# Altium PCB extensionV1.0.PcbDoc (part 2 of 2)
Units mm, origin at the board's own origin, x right, y up, seen from the top; angles counter-clockwise.
Board outline 110.36 x 57.4 mm, 2 copper layers (Top Layer, Bottom Layer); 166 components, 161 nets, 516 pads, 220 vias.
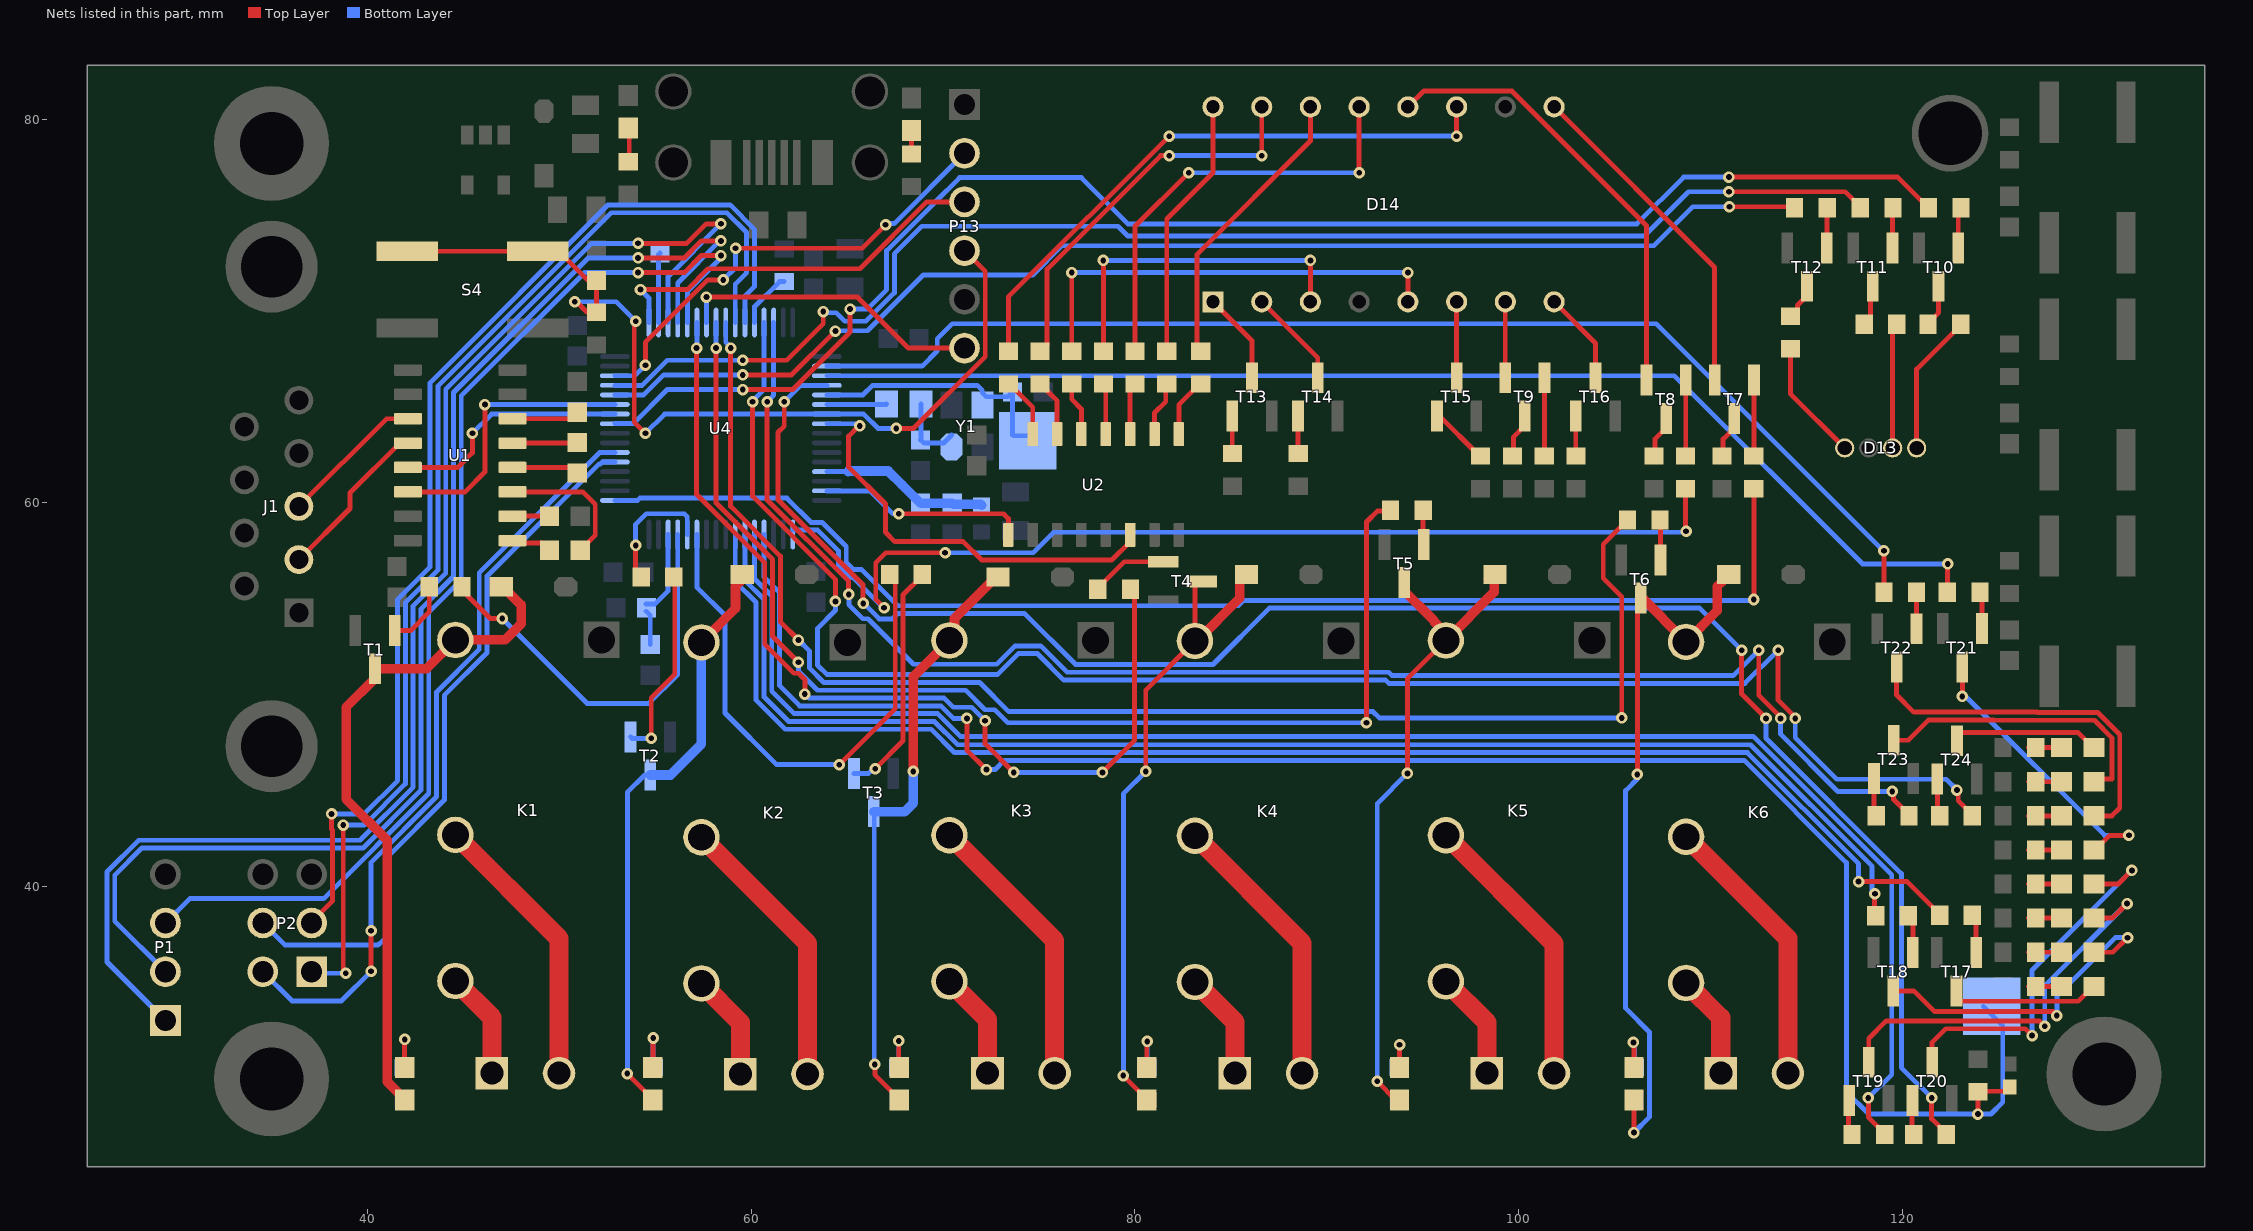
[diagram p2: the nets of this part, all layers, seen from the top]

## Via types
v1: diameter 0.6, hole 0.3, Top Layer to Bottom Layer, tented both sides, 220 vias

## Nets (pads, with @x,y where several pads share a name; then routed paths per layer and width w, separated by ;. In a path a pad name is that pad's centre, name@x,y a point inside that pad or via, vN(x,y) a via of type N, cw(c..) or ccw(c..) an arc to the next point about the centre after c; other vN are vias at no path point) (continued)
L1_L2: R19.2 U4.17 | length 54.6
  Top Layer w0.254: v1(66.929,54.534) 66.493,54.97 66.493,56.877 67.02,57.404 v1(70.104,57.404) ; v1@108.712,58.522 R19.2@108.712,60.745
  Bottom Layer w0.254: U4.17@62.17,58.581 62.172,58.583 63.464,58.583 64.546,57.501 64.546,56.742 65.168,56.12 65.299,56.12 66.885,54.534 v1(66.929,54.534) ; v1(70.104,57.404) 74.701,57.404 75.768,58.471 108.687,58.471 v1(108.737,58.522)
L3: R18.2 U4.33 | length 68.4
  Top Layer w0.254: v1(112.268,54.966) R18.2@112.268,60.745 R18.2@112.478,60.535
  Bottom Layer w0.254: U4.33@52.895,60.131 54.074,60.131 54.191,60.249 61.858,60.249 63.118,58.989 63.693,58.989 64.953,57.729 64.953,56.91 65.336,56.526 65.756,56.526 67.642,54.64 85.4,54.64 85.679,54.92 112.222,54.92 v1(112.268,54.966)
LD_1: U2.1 U4.15 | length 10.9
  Top Layer w0.254: v1(67.691,59.436) 73.152,59.436 73.406,59.182 U2.1@73.406,58.335
  Bottom Layer w0.254: U4.15@63.945,60.631 66.185,60.631 67.38,59.436 v1(67.691,59.436)
LED_1: R39.2 U4.23 | length 76
  Top Layer w0.254: v1(117.729,40.259) 120.256,40.259 121.959,38.556 R39.2@121.959,38.506
  Bottom Layer w0.254: U4.23@59.17,58.356 59.17,55.898 60.259,54.809 60.259,49.723 61.781,48.201 69.382,48.201 70.593,46.99 106.184,46.99 106.189,46.985 111.933,46.985 117.729,41.189 v1(117.729,40.259)
LED_2: R41.2 U4.22 | length 72.6
  Top Layer w0.254: R41.2@118.562,38.804 118.562,39.605 v1(118.581,39.624)
  Bottom Layer w0.254: U4.22@59.67,58.356 59.67,55.973 60.665,54.978 60.665,49.891 61.949,48.608 69.55,48.608 70.762,47.396 112.097,47.396 118.435,41.058 118.435,39.68 v1@118.491,39.624
LED_3: R43.2 U4.21 | length 85.3
  Top Layer w0.254: v1(118.237,28.981) 118.237,27.976 119.087,27.126 R43.2@119.087,27.076
  Bottom Layer w0.254: U4.21@60.17,58.356 60.17,56.048 61.072,55.146 61.072,50.18 62.238,49.014 69.718,49.014 70.904,47.828 112.24,47.828 119.456,40.612 119.456,30.201 v1(118.237,28.981)
LED_4: R45.2 U4.4 | length 94.2
  Top Layer w0.254: v1(61.722,65.278) 61.722,64.008 61.397,63.683 61.397,60.164 65.837,55.724 v1(65.837,54.762) ; v1(111.633,52.324) 111.633,50.038 v1(112.903,48.768) ; v1(121.539,28.981) 121.539,27.888 122.301,27.126 R45.2@122.301,27.076
  Bottom Layer w0.254: v1(61.722,65.278) 62.575,66.131 U4.4@63.945,66.131 ; v1(65.837,54.762) 65.862,54.762 66.67,53.954 67.366,53.954 67.64,54.229 74.26,54.229 76.912,51.577 84.074,51.577 87.01,54.513 109.444,54.513 v1(111.633,52.324) ; v1(112.903,48.768) 112.903,47.74 119.964,40.678 119.964,30.556 v1(121.539,28.981)
LED_5: R47.2 U4.3 | length 64
  Top Layer w0.254: R47.2@122.356,55.344 122.356,56.799 v1(122.377,56.82)
  Bottom Layer w0.254: U4.3@63.945,66.631 108.121,66.631 117.932,56.82 v1(122.377,56.82)
LED_6: R49.2 U4.2 | length 63.5
  Top Layer w0.254: v1(119.05,57.506) 119.05,55.417 119.015,55.383 R49.2@119.054,55.344
  Bottom Layer w0.254: U4.2@63.945,67.131 68.909,67.131 69.697,67.919 69.697,68.554 70.485,69.342 107.188,69.342 119.024,57.506 v1(119.05,57.506)
LED_7: R51.2 U4.62 | length 80.5
  Top Layer w0.254: v1(60.833,65.278) 60.833,60.153 65.077,55.909 65.077,55.24 v1(65.089,55.228) ; v1(112.522,52.324) 112.522,49.968 113.665,48.825 v1(113.665,48.768) ; v1(119.482,44.958) 119.548,44.892 119.548,44.547 120.357,43.738 R51.2@120.357,43.688
  Bottom Layer w0.254: v1(60.833,65.278) 61.17,65.615 U4.62@61.17,69.406 ; v1(65.089,55.228) 65.089,54.691 65.82,53.96 66.09,53.96 68.462,51.587 72.799,51.587 73.76,52.548 75.094,52.548 76.471,51.171 93.238,51.171 93.411,50.998 111.196,50.998 v1(112.522,52.324) ; v1(113.665,48.768) 113.665,47.946 116.653,44.958 v1(119.482,44.958)
LED_8: R53.2 U4.61 | length 88.6
  Top Layer w0.254: v1(60.071,65.278) 60.071,60.34 64.389,56.022 v1(64.389,54.864) ; v1(113.538,52.324) 113.538,49.714 114.427,48.825 v1(114.427,48.768) ; v1(122.86,45.034) 122.926,44.968 122.926,44.471 123.659,43.738 R53.2@123.659,43.688
  Bottom Layer w0.254: v1(60.071,65.278) 60.071,65.335 60.67,65.934 U4.61@60.67,69.406 ; v1(64.389,54.864) 64.389,54.391 63.45,53.451 63.45,51.552 63.956,51.046 72.833,51.046 73.928,52.141 74.925,52.141 76.302,50.764 93.07,50.764 93.242,50.592 111.806,50.592 v1(113.538,52.324) ; v1(114.427,48.768) 114.427,47.758 116.592,45.593 122.301,45.593 v1(122.86,45.034)
MISO: P1.2 U4.52 | length 67.8
  Top Layer w0.254: v1(54.102,72.771) 56.515,72.771 57.404,73.66 v1(58.42,73.66)
  Bottom Layer w0.254: P1.2@29.464,35.56 26.822,38.202 26.822,40.599 28.235,42.012 39.775,42.012 42.783,45.019 42.783,54.465 44.48,56.162 44.48,65.756 51.495,72.771 v1(54.102,72.771) ; U4.52@56.17,69.406 56.17,71.467 58.363,73.66 v1(58.42,73.66)
MOSI: P1.3 U4.53 | length 58.7
  Top Layer w0.254: v1(54.102,72.009) 56.515,72.009 57.404,72.898 v1(58.42,72.898)
  Bottom Layer w0.254: P1.3@29.464,38.1 30.734,39.37 37.709,39.37 43.189,44.851 43.189,54.297 44.887,55.994 44.887,65.588 51.308,72.009 v1(54.102,72.009) ; U4.53@56.67,69.406 56.67,71.021 58.42,72.771 v1(58.42,72.898)
NetC1_1: C1.1 U1.1 | length 2.1
  Top Layer w0.254: U1.1@47.556,58.039 47.691,57.904 49.119,57.904 C1.1@49.492,57.531
NetC1_2: C1.2 U1.3 | length 7.3
  Top Layer w0.254: U1.3@47.556,60.579 51.217,60.579 51.871,59.925 51.871,58.31 C1.2@51.092,57.531
NetC2_1: C2.1 U1.5 | length 3.4
  Top Layer w0.254: U1.5@47.556,63.119 50.889,63.119 C2.1@50.927,63.157
NetC2_2: C2.2 U1.4 | length 3.4
  Top Layer w0.254: U1.4@47.556,61.849 50.762,61.849 C2.2@50.927,61.684
NetC3_2: C3.2 U1.2 | length 1.9
  Top Layer w0.254: U1.2@47.556,59.309 C3.2@49.492,59.309
NetC4_2: C4.2 U1.6 | length 3.5
  Top Layer w0.254: U1.6@47.556,64.389 50.584,64.389 C4.2@50.927,64.732
NetC13_2: C13.2 R58.2 Y1.1 | length 3.7
  Bottom Layer w0.254: C13.2@68.834,63.284 C13.2@68.845,63.295 ; R58.2@68.845,65.151 C13.2@68.845,63.295 ; Y1.1@70.447,63.543 70.023,63.119 69.021,63.119 C13.2@68.845,63.295
NetC14_2: C14.2 P12.1 U4.5 Y1.3 | length 13.4
  Bottom Layer w0.254: U4.5@63.945,65.631 65.83,65.631 66.329,66.13 71.785,66.13 72.047,65.868 72.047,65.743 72.258,65.532 73.368,65.532 C14.2@73.622,65.786 73.622,63.538 73.66,63.5 P12.1@74.422,63.5
NetC15_2: C15.2 C16.2 U4.30 | length 6.2
  Bottom Layer w0.254: C15.2@54.521,54.356 54.737,54.14 C16.2@54.737,52.616 ; C15.2@54.521,54.737 54.991,54.737 55.67,55.416 U4.30@55.67,58.356
NetC24_2: C24.2 P13.4 R60.2 S4.1 S4.4 U4.7 | length 49.4
  Top Layer w0.254: S4.1@42.066,73.12 S4.4@48.866,73.12 49.966,73.12 51.712,71.374 51.727,71.374 C24.2@51.943,71.59 R60.2@51.943,69.938 51.441,69.938 50.894,70.485 v1(50.8,70.485) ; v1(53.975,69.469) 53.904,69.398 53.904,64.206 v1(54.483,63.627) ; v1(67.564,63.881) 68.456,63.881 72.199,67.625 72.199,72.073 P13.4@71.12,73.152
  Bottom Layer w0.254: v1(50.8,70.485) 52.959,70.485 v1(53.975,69.469) ; v1(54.483,63.627) 55.487,64.631 U4.7@63.945,64.631 65.87,64.631 66.62,63.881 v1(67.564,63.881)
NetC26_2: C26.2 C27.2 L1.1 U4.13 | length 8.8
  Bottom Layer w0.254: U4.13@63.945,61.631 63.947,61.633 65.062,61.633
  Bottom Layer w0.5: 65.062,61.633 65.091,61.662 67.138,61.662 67.853,60.947 67.869,60.947 C26.2@68.834,59.982 C27.2@70.485,59.982 70.535,59.932 71.959,59.932 L1.1@72.009,59.882
NetD1_1: D1.1 D2.1 K1.4 T1.3 | length 35.4
  Top Layer w0.5: D2.1@41.935,28.868 41.935,28.918 41.033,29.82 41.033,42.403 38.887,44.549 38.887,49.356 40.386,50.854 T1.3@40.386,51.354 43.074,51.354 K1.4@44.577,52.857 47.168,52.857 48.008,53.697 48.008,54.688 47.07,55.626 D1.1@46.96,55.626
NetD2_2: D2.2 R1.1 | length 2.9
  Top Layer w0.254: D2.2@41.935,30.568 v1(41.935,32.029)
  Bottom Layer w0.254: R1.1@41.91,30.568 41.935,30.593 v1(41.935,32.029)
NetD3_1: D3.1 D4.1 K2.4 T2.3 | length 31.4
  Top Layer w0.254: v1(53.543,30.251) 53.543,30.239 54.864,28.918 D4.1@54.864,28.868
  Top Layer w0.5: K2.4@57.404,52.73 59.182,54.508 59.182,55.656 59.427,55.901 59.427,56.011 59.677,56.261 D3.1@59.787,56.261
  Bottom Layer w0.254: v1(53.543,30.251) 53.543,44.907 54.453,45.817 T2.3@54.737,45.817
  Bottom Layer w0.5: T2.3@54.737,45.817 55.792,45.817 57.404,47.429 K2.4@57.404,52.73
NetD4_2: D4.2 R4.1 | length 3.1
  Top Layer w0.254: D4.2@54.864,30.568 54.889,30.593 v1(54.889,32.106)
  Bottom Layer w0.254: R4.1@54.889,30.568 v1(54.889,32.106)
NetD5_1: D5.1 D6.1 K3.4 T3.3 | length 31.6
  Top Layer w0.254: v1(66.446,30.73) 66.446,30.188 67.716,28.918 D6.1@67.716,28.868
  Top Layer w0.5: v1(68.453,45.999) 68.453,50.952 K3.4@70.333,52.832 70.6,53.1 70.6,53.977 72.758,56.134 D5.1@72.868,56.134
  Bottom Layer w0.254: T3.3@66.387,43.908 66.417,43.878 66.417,30.76 v1(66.446,30.73) v1@66.446,30.675
  Bottom Layer w0.5: T3.3@66.387,43.908 68.012,43.908 68.453,44.348 v1(68.453,45.999)
NetD6_2: D6.2 R7.1 | length 3.1
  Top Layer w0.254: v1(67.691,31.953) 67.691,30.39 D6.2@67.716,30.365
  Bottom Layer w0.254: R7.1@67.691,30.441 v1(67.691,31.953)
NetD7_1: D7.1 D8.1 K4.4 T4.3 | length 34
  Top Layer w0.254: v1(79.4,30.15) 79.4,30.137 80.62,28.918 D8.1@80.62,28.868 ; v1(80.569,45.999) 80.569,50.241 K4.4@83.134,52.807 83.134,55.727 83.312,55.905 T4.3@83.469,55.905
  Top Layer w0.5: K4.4@83.134,52.807 83.239,52.807 85.462,55.03 85.462,56.011 85.712,56.261 D7.1@85.822,56.261
  Bottom Layer w0.254: v1(79.4,30.15) 79.4,44.831 v1(80.569,45.999)
NetD8_2: D8.2 R10.1 | length 2.7
  Top Layer w0.254: D8.2@80.62,30.568 80.62,31.902 v1(80.645,31.928)
  Bottom Layer w0.254: R10.1@80.62,30.568 80.645,30.593 v1(80.645,31.928)
NetD9_1: D9.1 D10.1 K5.4 T5.3 | length 34.9
  Top Layer w0.254: v1(92.634,29.845) 93.611,28.868 D10.1@93.802,28.868 ; v1(94.209,45.898) 94.209,50.825 K5.4@96.215,52.832
  Top Layer w0.5: T5.3@94.04,55.846 94.04,55.42 95.573,53.887 95.573,53.853 96.215,53.211 K5.4@96.215,52.832 98.73,55.347 98.73,56.215 D9.1@98.776,56.261 98.666,56.261 D9.1@98.416,56.011
  Bottom Layer w0.254: v1(92.634,29.845) 92.634,44.323 v1(94.209,45.898)
NetD10_2: D10.2 R12.1 | length 2.4
  Top Layer w0.254: D10.2@93.802,30.568 v1(93.802,31.75)
  Bottom Layer w0.254: R12.1@93.777,30.568 93.802,30.593 v1(93.802,31.75)
NetD11_1: D11.1 D12.1 K6.4 T6.3 | length 39
  Top Layer w0.254: v1(106.02,27.178) D12.1@106.02,28.868 ; v1(106.197,45.847) 106.197,54.86 T6.3@106.375,55.037
  Top Layer w0.5: T6.3@106.35,55.55 106.35,55.143 K6.4@108.737,52.756 110.363,54.381 110.363,55.656 110.608,55.901 110.608,56.011 110.858,56.261 D11.1@110.968,56.261
  Bottom Layer w0.254: v1(106.02,27.178) 106.824,27.983 106.824,32.418 105.588,33.655 105.588,44.999 106.197,45.609 v1(106.197,45.847)
NetD12_2: D12.2 R14.1 | length 2.6
  Top Layer w0.254: v1(105.994,31.877) 106.02,31.852 D12.2@106.02,30.568
  Bottom Layer w0.254: v1(105.994,31.877) 106.045,31.826 R14.1@106.045,30.568
NetD13_2: D13.2 R30.2 | length 6.3
  Top Layer w0.254: R30.2@114.173,68.035 114.173,65.699 D13.2@117.007,62.865
NetD13_3: D13.3 R29.2 | length 6.5
  Top Layer w0.254: D13.3@119.507,62.865 119.507,69.102 R29.2@119.722,69.317
NetD13_4: D13.4 R31.2 | length 7.4
  Top Layer w0.254: D13.4@120.757,62.865 120.757,66.974 123.049,69.267 R31.2@123.049,69.317
NetD14_1: D14.1 T13.3 | length 4.8
  Top Layer w0.254: D14.1@84.074,70.485 86.106,68.453 T13.3@86.106,66.527
NetD14_2: D14.2 T14.3 | length 5.2
  Top Layer w0.254: D14.2@86.614,70.485 89.535,67.564 T14.3@89.535,66.527
NetD14_3: D14.3 R25.1 | length 17.7
  Top Layer w0.254: R25.1@78.359,67.906 v1(78.359,72.644) ; D14.3@89.154,70.485 v1(89.154,72.644)
  Bottom Layer w0.254: v1(78.359,72.644) v1(89.154,72.644)
NetD14_5: D14.5 R26.1 | length 23.2
  Top Layer w0.254: R26.1@76.708,67.906 v1(76.708,72.009) ; D14.5@94.234,70.485 v1(94.234,72.009)
  Bottom Layer w0.254: v1(76.708,72.009) v1(94.234,72.009)
NetD14_6: D14.6 T15.3 | length 4.1
  Top Layer w0.254: T15.3@96.774,66.527 D14.6@96.774,70.485
  Top Layer w0.5: D14.6@96.702,70.413 D14.6@96.774,70.485 ; T15.3@96.774,66.527 T15.3@96.829,66.582
NetD14_7: D14.7 T9.2 | length 4
  Top Layer w0.254: T9.2@99.305,66.527 99.309,66.531 D14.7@99.309,70.48
  Top Layer w0.5: D14.7@99.309,70.48 D14.7@99.314,70.485
NetD14_8: D14.8 T16.3 | length 4.9
  Top Layer w0.254: D14.8@101.854,70.485 104.013,68.326 T16.3@104.013,66.527
NetD14_9: D14.9 T7.2 | length 17.7
  Top Layer w0.254: D14.9@101.854,80.645 110.227,72.272 T7.2@110.227,66.4
NetD14_11: D14.11 R27.1 | length 31.2
  Top Layer w0.254: R27.1@73.406,67.906 73.406,70.739 v1(81.788,79.121) ; v1(96.774,79.121) D14.11@96.774,80.645
  Bottom Layer w0.254: v1(81.788,79.121) v1(96.774,79.121)
NetD14_12: D14.12 T8.2 | length 23.7
  Top Layer w0.254: D14.12@94.234,80.645 95.063,81.474 99.658,81.474 106.671,74.461 T8.2@106.671,66.4
NetD14_13: D14.13 R24.1 | length 22.8
  Top Layer w0.254: R24.1@80.01,67.906 80.01,74.422 v1(82.804,77.216) ; v1(91.694,77.216) D14.13@91.694,80.645
  Bottom Layer w0.254: v1(82.804,77.216) v1(91.694,77.216)
NetD14_14: D14.14 R22.1 | length 15.3
  Top Layer w0.254: R22.1@83.439,67.906 83.245,68.1 83.245,72.958 89.154,78.867 D14.14@89.154,80.645
NetD14_15: D14.15 R28.1 | length 20.6
  Top Layer w0.254: R28.1@75.057,67.906 75.107,67.906 75.43,68.229 75.43,72.188 81.347,78.105 v1(81.788,78.105) ; v1(86.614,78.105) D14.15@86.614,80.645
  Bottom Layer w0.254: v1(81.788,78.105) v1(86.614,78.105)
NetD14_16: D14.16 R23.1 | length 13.7
  Top Layer w0.254: R23.1@81.661,67.906 81.661,74.803 84.074,77.216 D14.16@84.074,80.645
NetD15_1: D15.1 T17.3 | length 7.5
  Top Layer w0.254: T17.3@122.809,34.019 129.18,34.019 129.959,34.798 D15.1@130.009,34.798
NetD15_2: D15.2 R40.1 | length 1.7
  Top Layer w0.254: R40.1@126.58,34.798 D15.2@128.309,34.798
NetD16_1: D16.1 T18.3 | length 17.1
  Top Layer w0.254: T18.3@119.532,34.565 120.607,34.565 121.691,33.481 127.86,33.481 v1(128.067,33.274) ; D16.1@130.009,36.576 130.988,36.576 v1(131.75,37.338)
  Bottom Layer w0.254: v1(128.067,33.274) 128.067,34.29 131.115,37.338 v1(131.75,37.338)
NetD16_2: D16.2 R42.1 | length 1.7
  Top Layer w0.254: R42.1@126.58,36.576 D16.2@128.309,36.576
NetD17_1: D17.1 T19.3 | length 21.1
  Top Layer w0.254: T19.3@118.262,30.84 118.262,32.08 119.177,32.995 127.152,32.995 v1(127.432,32.715) ; D17.1@130.009,38.354 130.962,38.354 v1(131.724,39.116)
  Bottom Layer w0.254: v1(127.432,32.715) 127.432,34.823 v1(131.724,39.116)
NetD17_2: D17.2 R44.1 | length 1.7
  Top Layer w0.254: R44.1@126.58,38.354 D17.2@128.309,38.354
NetD18_1: D18.1 T20.3 | length 19.7
  Top Layer w0.254: T20.3@121.564,30.84 121.564,31.877 122.276,32.588 126.416,32.588 v1(126.771,32.233) ; D18.1@130.009,40.132 131.267,40.132 v1(131.978,40.843)
  Bottom Layer w0.254: v1(126.771,32.233) 126.771,35.636 v1(131.978,40.843)
NetD18_2: D18.2 R46.1 | length 1.7
  Top Layer w0.254: R46.1@126.58,40.132 D18.2@128.309,40.132
NetD19_1: D19.1 T21.3 | length 15.2
  Top Layer w0.254: v1(123.139,49.911) T21.3@123.139,51.456 ; D19.1@130.009,41.91 130.059,41.91 130.821,42.672 v1(131.826,42.672)
  Bottom Layer w0.254: v1@123.317,49.911 130.556,42.672 v1(131.826,42.672)
NetD19_2: D19.2 R48.1 | length 1.7
  Top Layer w0.254: R48.1@126.58,41.91 D19.2@128.309,41.91
NetD20_1: D20.1 T22.3 | length 19.3
  Top Layer w0.254: T22.3@119.71,51.456 119.71,49.987 120.603,49.095 127.033,49.095 127.051,49.077 130.196,49.077 131.343,47.929 131.343,44.094 130.937,43.688 D20.1@130.009,43.688
NetD20_2: D20.2 R50.1 | length 1.7
  Top Layer w0.254: R50.1@126.58,43.688 D20.2@128.309,43.688
NetD21_1: D21.1 T23.3 | length 15.3
  Top Layer w0.254: T23.3@119.558,47.629 120.324,47.629 121.383,48.688 124.797,48.688 124.815,48.67 130.028,48.67 130.937,47.761 130.937,45.615 130.158,45.615 D21.1@130.009,45.466
NetD21_2: D21.2 R52.1 | length 1.7
  Top Layer w0.254: R52.1@126.58,45.466 D21.2@128.309,45.466
NetD22_1: D22.1 T24.3 | length 7.8
  Top Layer w0.254: T24.3@122.86,47.604 122.86,47.845 123.038,48.023 129.18,48.023 129.959,47.244 D22.1@130.009,47.244
NetD22_2: D22.2 R54.1 | length 1.7
  Top Layer w0.254: R54.1@126.58,47.244 D22.2@128.309,47.244
NetD23_2: D23.2 R55.1 | length 1.7
  Top Layer w0.254: R55.1@68.072,77.943 68.351,78.222 68.351,79.135 D23.2@68.072,79.414
NetD25_2: D25.2 R56.1 | length 1.6
  Top Layer w0.254: R56.1@53.645,78.003 D25.2@53.645,79.566
NetJ1_2: J1.2 U1.12 | length 8.7
  Top Layer w0.254: J1.2@36.42,57.047 39.083,59.71 39.083,60.521 41.681,63.119 U1.12@42.106,63.119
NetJ1_3: J1.3 U1.11 | length 7.6
  Top Layer w0.254: J1.3@36.42,59.817 40.992,64.389 U1.11@42.106,64.389
NetK1_2: K1.2 P3.1 | length 5.7
  Top Layer w1: K1.2@44.577,35.077 46.482,33.172 P3.1@46.482,30.272
  Bottom Layer w1: P3.1@46.419,30.035 P3.1@46.482,29.972
NetK1_3: K1.3 P3.2 | length 15
  Top Layer w1: K1.3@44.577,42.697 49.982,37.292 P3.2@49.982,30.272
  Bottom Layer w1: P3.2@49.982,29.972 P3.2@49.982,30.272
NetK2_2: K2.2 P4.1 | length 5.6
  Top Layer w1: K2.2@57.404,34.95 59.436,32.918 P4.1@59.436,30.226
NetK2_3: K2.3 P4.2 | length 15
  Top Layer w1: K2.3@57.404,42.57 62.936,37.038 P4.2@62.936,30.226
  Bottom Layer w1: P4.2@62.611,30.226 P4.2@62.865,29.972
NetK3_2: K3.2 P5.1 | length 5.9
  Top Layer w1: K3.2@70.333,35.052 72.319,33.066 P5.1@72.319,30.272
  Bottom Layer w1: P5.1@72.136,30.155 P5.1@72.319,29.972
NetK3_3: K3.3 P5.2 | length 15
  Top Layer w1: K3.3@70.333,42.672 75.819,37.186 P5.2@75.819,30.272
  Bottom Layer w1: P5.2@75.819,29.972 P5.2@75.819,30.272
NetK4_2: K4.2 P6.1 | length 5.7
  Top Layer w1: K4.2@83.134,35.027 85.217,32.944 P6.1@85.217,30.272
  Bottom Layer w1: P6.1@85.153,30.035 P6.1@85.217,29.972
NetK4_3: K4.3 P6.2 | length 15.1
  Top Layer w1: K4.3@83.134,42.647 88.717,37.064 P6.2@88.717,30.272
  Bottom Layer w1: K4.3@83.134,42.647 K4.3@83.205,42.647 ; P6.2@88.717,29.972 P6.2@88.717,30.272
NetK5_2: K5.2 P7.1 | length 5.8
  Top Layer w1: K5.2@96.215,35.052 98.354,32.913 P7.1@98.354,30.272
  Bottom Layer w1: P7.1@98.262,30.064 P7.1@98.354,29.972
NetK5_3: K5.3 P7.2 | length 15
  Top Layer w1: K5.3@96.215,42.672 101.854,37.033 P7.2@101.854,30.272
  Bottom Layer w1: P7.2@101.854,29.972 P7.2@101.854,30.272
NetK6_2: K6.2 P8.1 | length 5.7
  Top Layer w1: K6.2@108.737,34.976 110.546,33.167 P8.1@110.546,30.272 ; P8.1@110.454,30.064 P8.1@110.546,29.972
  Bottom Layer w1: K6.2@108.737,34.945 K6.2@108.737,34.976 ; P8.1@110.454,30.064 P8.1@110.546,29.972
NetK6_3: K6.3 P8.2 | length 14.8
  Top Layer w1: K6.3@108.737,42.596 114.046,37.287 P8.2@114.046,30.272
  Bottom Layer w1: P8.2@114.046,29.972 P8.2@114.046,30.272
NetP11_1: P11.1 U4.50 | length 3.7
  Bottom Layer w0.254: U4.50@55.17,69.406 55.17,72.95 P11.1@55.245,73.025
NetP13_2: P13.2 U4.46 | length 24.3
  Top Layer w0.254: v1(54.483,67.183) 54.483,68.372 57.739,71.628 v1(58.547,71.628) ; v1(59.182,73.279) 65.786,73.279 v1(67.005,74.498)
  Bottom Layer w0.254: U4.46@52.895,66.631 52.897,66.633 53.933,66.633 v1(54.483,67.183) ; v1(58.547,71.628) 59.182,72.263 v1(59.182,73.279) ; v1(67.005,74.498) 67.071,74.564 67.452,74.564 P13.2@71.12,78.232
NetP13_3: P13.3 U4.49 | length 20.7
  Top Layer w0.254: v1(54.229,71.12) 56.656,71.12 57.744,72.207 65.673,72.207 69.158,75.692 P13.3@71.12,75.692
  Bottom Layer w0.254: v1(54.229,71.12) 54.67,70.679 U4.49@54.67,69.406
NetP13_6: P13.6 U4.55 | length 15.9
  Top Layer w0.254: v1(57.664,70.733) 65.538,70.733 68.199,68.072 P13.6@71.12,68.072
  Bottom Layer w0.254: v1(57.664,70.733) 57.668,70.729 57.668,69.408 U4.55@57.67,69.406
NetR2_1: R2.1 T1.1 | length 3.5
  Top Layer w0.254: T1.1@41.411,53.344 42.245,53.344 43.219,54.319 R2.1@43.219,55.626 ; R2.1@43.18,55.626 R2.1@43.189,55.617
NetR5_1: R5.1 T2.1 | length 10
  Top Layer w0.254: v1(54.788,47.727) 54.788,49.845 56.016,51.073 56.016,56.086 R5.1@55.968,56.134
  Bottom Layer w0.254: T2.1@53.712,47.807 53.793,47.727 v1(54.788,47.727)
NetR8_1: R8.1 T3.1 | length 12.4
  Top Layer w0.254: v1(66.463,46.147) 67.915,47.599 67.915,55.204 68.922,56.211 R8.1@68.922,56.261 R8.1@68.979,56.204
  Bottom Layer w0.254: T3.1@65.362,45.898 66.12,45.898 66.369,46.147 v1(66.463,46.147)
NetR11_1: R11.1 T4.1 | length 4
  Top Layer w0.254: R11.1@78.068,55.499 78.068,55.549 79.449,56.93 T4.1@81.479,56.93
NetR13_1: R13.1 T5.1 | length 1.7
  Top Layer w0.254: T5.1@95.03,57.866 95.03,59.611 R13.1@95.033,59.614
NetR15_1: R15.1 T6.1 | length 1.8
  Top Layer w0.254: R15.1@107.34,58.826 107.4,58.767 T6.1@107.4,57.027
NetR16_1: R16.1 T7.3 | length 2.3
  Top Layer w0.254: R16.1@110.617,62.445 110.667,62.445 110.667,63.325 111.252,63.91 T7.3@111.252,64.41
NetR17_1: R17.1 T8.3 | length 2.3
  Top Layer w0.254: R17.1@107.061,62.445 107.111,62.445 107.111,63.325 107.696,63.91 T8.3@107.696,64.41
NetR18_1: R18.1 T7.1 | length 4
  Top Layer w0.254: R18.1@112.268,62.445 112.277,62.454 T7.1@112.277,66.4
NetR19_1: R19.1 T8.1 | length 4
  Top Layer w0.254: R19.1@108.712,62.445 108.721,62.454 T8.1@108.721,66.4
NetR20_2: R20.2 T9.3 | length 2.4
  Top Layer w0.254: R20.2@99.695,62.445 99.745,62.445 99.745,63.452 100.33,64.037 T9.3@100.33,64.537
NetR21_2: R21.2 T9.1 | length 4.1
  Top Layer w0.254: R21.2@101.346,62.445 101.355,62.454 T9.1@101.355,66.527
NetR22_2: R22.2 U2.9 | length 3.1
  Top Layer w0.254: U2.9@82.296,63.585 82.296,65.113 83.389,66.206 R22.2@83.439,66.206
NetR23_2: R23.2 U2.10 | length 2.9
  Top Layer w0.254: U2.10@81.026,63.585 81.026,64.693 81.611,65.278 81.611,66.206 R23.2@81.661,66.206
NetR24_2: R24.2 U2.11 | length 2.7
  Top Layer w0.254: U2.11@79.756,63.585 79.756,65.952 R24.2@80.01,66.206
NetR25_2: R25.2 U2.12 | length 2.7
  Top Layer w0.254: R25.2@78.359,66.206 78.486,66.079 U2.12@78.486,63.585
NetR26_2: R26.2 U2.13 | length 2.8
  Top Layer w0.254: R26.2@76.708,66.206 76.708,65.405 77.216,64.897 U2.13@77.216,63.585
NetR27_2: R27.2 U2.15 | length 3.2
  Top Layer w0.254: R27.2@73.406,66.206 73.456,66.206 74.676,64.986 U2.15@74.676,63.585
NetR28_2: R28.2 U2.14 | length 3
  Top Layer w0.254: R28.2@75.057,66.206 75.107,66.206 75.43,65.883 75.43,65.833 75.946,65.317 U2.14@75.946,63.585
NetR29_1: R29.1 T11.3 | length 2.2
  Top Layer w0.254: R29.1@118.022,69.317 118.345,69.64 118.345,71.167 T11.3@118.471,71.293
NetR30_1: R30.1 T12.3 | length 1.9
  Top Layer w0.254: R30.1@114.173,69.735 114.223,69.735 114.546,70.058 114.546,70.297 115.042,70.793 T12.3@115.042,71.293
NetR31_1: R31.1 T10.3 | length 2.2
  Top Layer w0.254: R31.1@121.349,69.317 121.349,69.367 121.9,69.917 T10.3@121.9,71.293
NetR32_2: R32.2 T12.1 | length 2.1
  Top Layer w0.254: T12.1@116.067,73.283 116.09,73.306 R32.2@116.09,75.387
NetR33_2: R33.2 T11.1 | length 2.1
  Top Layer w0.254: T11.1@119.496,73.283 119.496,75.364 R33.2@119.519,75.387
NetR34_2: R34.2 T10.1 | length 2.2
  Top Layer w0.254: T10.1@122.925,73.283 122.925,75.237 R34.2@123.075,75.387
NetR35_2: R35.2 T13.1 | length 2
  Top Layer w0.254: T13.1@85.081,64.537 85.081,62.581 R35.2@85.09,62.572
NetR36_2: R36.2 T14.1 | length 2
  Top Layer w0.254: T14.1@88.51,64.537 88.51,62.581 R36.2@88.519,62.572
NetR37_2: R37.2 T15.1 | length 3.2
  Top Layer w0.254: T15.1@95.749,64.537 95.813,64.601 97.969,62.445 R37.2@98.019,62.445
NetR38_2: R38.2 T16.1 | length 2.1
  Top Layer w0.254: T16.1@102.988,64.537 102.988,62.454 R38.2@102.997,62.445
NetR39_1: R39.1 T17.1 | length 2.1
  Top Layer w0.254: R39.1@123.532,38.481 123.855,38.158 123.855,36.559 T17.1@123.859,36.555
NetR41_1: R41.1 T18.1 | length 2
  Top Layer w0.254: R41.1@120.32,38.481 120.557,38.243 T18.1@120.557,36.555
NetR43_1: R43.1 T19.1 | length 1.9
  Top Layer w0.254: T19.1@117.212,28.875 117.212,27.251 R43.1@117.387,27.076
NetR45_1: R45.1 T20.1 | length 1.8
  Top Layer w0.254: T20.1@120.514,28.875 120.514,27.163 R45.1@120.601,27.076
NetR47_1: R47.1 T21.1 | length 2.1
  Top Layer w0.254: R47.1@123.929,55.471 R47.1@124.056,55.344 124.164,55.236 T21.1@124.164,53.446
NetR49_1: R49.1 T22.1 | length 2
  Top Layer w0.254: R49.1@120.627,55.344 120.802,55.169 120.752,55.118 T22.1@120.752,53.442
NetR51_1: R51.1 T23.1 | length 2
  Top Layer w0.254: T23.1@118.533,45.639 118.533,43.812 R51.1@118.657,43.688
NetR53_1: R53.1 T24.1 | length 2
  Top Layer w0.254: T24.1@121.835,45.614 121.835,43.812 R53.1@121.959,43.688
NetR58_1: R58.1 U4.6 | length 3.1
  Bottom Layer w0.254: U4.6@63.945,65.131 67.025,65.131 R58.1@67.045,65.151
NetR59_2: R59.2 U4.60 | length 2.9
  Bottom Layer w0.254: U4.60@60.17,69.406 60.17,70.231 61.479,71.54 R59.2@61.722,71.54
PH_1: U2.6 U4.8 | length 22.5
  Top Layer w0.254: v1(65.655,64.012) 65.606,64.012 65.08,63.486 65.08,61.863 67,59.942 67,58.476 67.493,57.983 71.049,57.983 72.009,57.023 78.794,57.023 79.756,57.985 U2.6@79.756,58.335
  Bottom Layer w0.254: U4.8@63.945,64.131 65.536,64.131 v1(65.655,64.012)
RELAY_1: R2.2 U4.29 | length 21.9
  Top Layer w0.254: R2.2@44.919,55.626 44.831,55.538 46.394,53.975 v1(47.015,53.975)
  Bottom Layer w0.254: v1(47.015,53.975) 51.44,49.551 54.667,49.551 56.17,51.054 U4.29@56.17,58.356
RELAY_2: R5.2 U4.28 | length 7.4
  Top Layer w0.254: v1(53.975,57.785) 53.975,55.891 54.243,56.159 54.268,56.184 R5.2@54.268,56.134
  Bottom Layer w0.254: v1(53.975,57.785) 53.975,58.883 54.528,59.436 56.515,59.436 56.668,59.283 56.668,58.358 U4.28@56.67,58.356
RELAY_3: R8.2 U4.27 | length 28.2
  Top Layer w0.254: v1(64.592,46.355) 67.508,49.271 67.508,55.975 R8.2@67.222,56.261
  Bottom Layer w0.254: U4.27@57.17,58.356 57.17,55.6 58.633,54.136 58.633,49.05 61.328,46.355 v1(64.592,46.355)
RELAY_4: R11.2 U4.54 | length 50.2
  Top Layer w0.254: v1(57.15,68.072) 57.15,60.446 60.706,56.89 60.706,52.637 62.224,51.119 62.467,51.119 62.806,50.78 62.806,50.055 v1(62.789,50.038) ; v1(72.193,48.641) 72.193,47.441 v1(73.685,45.949) ; v1(78.308,45.949) 79.985,47.625 79.985,55.282 R11.2@79.768,55.499 R11.2@79.768,55.549
  Bottom Layer w0.254: v1(57.15,68.072) 57.17,68.092 U4.54@57.17,69.406 ; v1(62.789,50.038) 63,49.827 70.055,49.827 70.535,49.347 71.487,49.347 v1(72.193,48.641) ; v1(73.685,45.949) v1(78.308,45.949)
RELAY_5: R13.2 U4.56 | length 62.7
  Top Layer w0.254: v1(58.166,68.072) 58.166,60.004 61.112,57.058 61.112,53.05 v1(62.464,51.699) ; v1(92.075,48.539) 92.075,59.004 92.659,59.588 93.308,59.588 R13.2@93.333,59.614
  Bottom Layer w0.254: v1(58.166,68.072) 58.17,68.076 U4.56@58.17,69.406 ; v1(62.464,51.699) 62.464,51.226 63.457,50.233 71.176,50.233 72.189,49.22 72.7,49.22 73.381,48.539 v1(92.075,48.539)
RELAY_6: R15.2 U4.57 | length 74.3
  Top Layer w0.254: v1(58.928,68.072) 58.928,59.817 61.519,57.226 61.519,53.797 v1(62.464,52.852) ; v1(105.385,48.793) 105.385,55.118 104.419,56.083 104.419,57.836 105.41,58.826 R15.2@105.64,58.826
  Bottom Layer w0.254: U4.57@58.67,69.406 58.672,69.404 58.672,68.385 58.928,68.129 v1(58.928,68.072) ; v1(62.464,52.852) 63.043,52.273 63.043,51.384 63.787,50.64 71.915,50.64 73.436,49.119 92.417,49.119 92.742,48.793 v1(105.385,48.793)
RGB_B: R34.1 U4.41 | length 78.4
  Top Layer w0.254: v1(59.563,65.913) 62.16,65.913 65.151,68.904 v1(65.151,70.104) ; v1(110.973,76.987) 119.775,76.987 121.002,75.76 121.052,75.76 121.375,75.437 R34.1@121.375,75.387
  Bottom Layer w0.254: U4.41@52.895,64.131 52.897,64.133 53.846,64.133 55.626,65.913 v1(59.563,65.913) ; v1(65.151,70.104) 66.04,70.104 67.056,71.12 67.056,73.152 69.563,75.659 69.563,75.662 70.863,76.962 77.216,76.962 79.629,74.549 106.172,74.549 108.61,76.987 v1(110.973,76.987)
RGB_G: R33.1 U4.45 | length 71.9
  Top Layer w0.254: v1(59.563,67.437) 61.849,67.437 63.754,69.342 v1(63.754,69.977) ; v1(110.973,76.225) 117.031,76.225 117.819,75.437 R33.1@117.819,75.387
  Bottom Layer w0.254: U4.45@52.895,66.131 54.32,66.131 55.626,67.437 v1(59.563,67.437) ; v1(63.754,69.977) 63.817,69.914 64.435,69.914 64.88,69.469 65.98,69.469 67.462,70.952 67.462,72.984 68.901,74.422 79.121,74.422 79.629,73.914 106.553,73.914 108.864,76.225 v1(110.973,76.225)
RGB_R: R32.1 U4.44 | length 65.7
  Top Layer w0.254: v1(59.563,66.675) 62.103,66.675 64.276,68.848 64.375,68.848 64.389,68.834 v1(64.389,68.961) ; v1(110.998,75.438) 114.339,75.438 R32.1@114.39,75.387
  Bottom Layer w0.254: U4.44@52.895,65.631 54.395,65.631 55.439,66.675 v1(59.563,66.675) ; v1(64.389,68.961) 64.406,68.978 66.064,68.978 68.967,71.882 74.676,71.882 76.2,73.406 107.061,73.406 109.093,75.438 v1(110.998,75.438)
SCK: P1.1 U4.51 | length 72.4
  Top Layer w0.254: v1(54.102,73.533) 56.642,73.533 57.658,74.549 v1(58.42,74.549)
  Bottom Layer w0.254: P1.1@29.464,33.02 26.416,36.068 26.416,40.767 28.067,42.418 39.607,42.418 42.377,45.187 42.377,54.633 44.074,56.331 44.074,65.924 51.683,73.533 v1(54.102,73.533) ; U4.51@55.67,69.406 55.67,71.799 v1(58.42,74.549)
SCL: P2.1 U4.58 | length 60.3
  Top Layer w0.254: v1(38.735,43.205) 38.735,35.611 v1(38.862,35.484)
  Bottom Layer w0.254: P2.1@37.084,35.56 37.16,35.484 v1(38.862,35.484) ; v1(38.735,43.205) 39.82,43.205 41.97,45.356 41.97,54.802 43.667,56.499 43.667,66.093 52.703,75.128 58.73,75.128 59.761,74.097 59.761,71.997 59.17,71.406 U4.58@59.17,69.406
SDA: P2.3 U4.59 | length 58.1
  Top Layer w0.254: P2.3@37.084,38.1 37.084,38.163 38.163,39.243 38.163,42.958 38.125,42.996 v1(38.125,43.79)
  Bottom Layer w0.254: P2.3@37.084,38.1 P2.3@37.084,38.157 ; v1(38.125,43.79) 39.829,43.79 41.564,45.524 41.564,54.97 43.261,56.667 43.261,66.261 52.535,75.535 58.898,75.535 60.168,74.265 60.168,71.273 59.67,70.776 U4.59@59.67,69.406
TEMP: P10.1 R57.2 R61.2 U4.20 | length 98.2
  Top Layer w0.254: v1(71.247,48.768) 71.247,47.117 v1(72.263,46.101) ; v1(123.952,28.143) R57.2@123.952,29.3 123.979,29.327 125.38,29.327 R61.2@125.603,29.55
  Bottom Layer w0.254: U4.20@60.67,58.356 60.67,56.123 61.478,55.314 61.478,50.469 62.526,49.421 69.887,49.421 70.539,48.768 v1(71.247,48.768) ; v1(72.263,46.101) 72.714,46.101 73.191,46.579 111.765,46.579 117.094,41.25 117.094,29.305 118.256,28.143 v1(123.952,28.143) 124.633,28.143 125.247,28.758 125.247,32.741 P10.1@124.231,33.757
USART6_RX: P2.2 U4.38 | length 39.6
  Top Layer w0.254: v1(40.183,35.585) v1(40.183,37.694)
  Bottom Layer w0.254: P2.2@34.544,35.56 36.068,34.036 38.633,34.036 v1(40.183,35.585) ; v1(40.183,37.694) 40.183,41.269 43.596,44.682 43.596,50.038 ; 43.596,50.138 45.822,52.363 45.822,56.354 52.096,62.629 52.893,62.629 U4.38@52.895,62.631
USART6_TX: P2.4 U4.37 | length 37.2
  Bottom Layer w0.254: P2.4@34.544,38.1 35.687,36.957 40.538,36.957 40.594,37.013 40.626,37.013 41.046,37.433 41.046,41.558 44.002,44.514 44.002,49.969 46.228,52.195 46.228,56.186 52.077,62.035 52.153,62.035 52.249,62.131 U4.37@52.895,62.131
USART_RX: U1.14 U4.43 | length 14.7
  Top Layer w0.254: U1.14@42.106,60.579 45.085,60.579 46.121,61.615 v1(46.121,65.131)
  Bottom Layer w0.254: v1(46.121,65.131) U4.43@52.895,65.131
USART_TX: U1.13 U4.42 | length 12.5
  Top Layer w0.254: U1.13@42.106,61.849 44.704,61.849 45.466,62.611 v1(45.466,63.627)
  Bottom Layer w0.254: v1(45.466,63.627) 46.47,64.631 U4.42@52.895,64.631
pads on no net: J1.1 J1.4 J1.6 J1.7 J1.8 J1.9 J1.M1 J1.M2 P9.2 P9.3 P9.4 U1.7 U1.8 U1.9 U1.10 U3.4 U4.40

## Polygon pours and split planes (outlines as drawn)
GND on Top Layer "Top Layer-GND" (solid, pour order 0): 25.4,82.804 135.763,82.804 135.763,25.4 25.4,25.4
GND on Bottom Layer "Bottom Layer-GND" (solid, pour order 2): 25.4,82.804 135.763,82.804 135.763,25.4 25.4,25.4

## Keep-outs
Keep-Out Layer:
  the board outline again, w0.2

## Other copper
Top Layer:
  pour cut-out: 45.085,42.761 45.212,42.761 52.451,42.761 52.451,25.362 44.831,25.362 44.831,42.761
  pour cut-out: 70.866,42.799 70.993,42.799 78.232,42.799 78.232,25.4 70.612,25.4 70.612,42.799
  pour cut-out: 58.039,42.799 58.166,42.799 65.405,42.799 65.405,25.4 57.785,25.4 57.785,42.799
  pour cut-out: 83.693,42.799 83.82,42.799 91.059,42.799 91.059,25.4 83.439,25.4 83.439,42.799
  pour cut-out: 109.22,42.799 109.347,42.799 116.586,42.799 116.586,25.4 108.966,25.4 108.966,42.799
  pour cut-out: 97.028,42.799 97.155,42.799 104.394,42.799 104.394,25.4 96.774,25.4 96.774,42.799
Bottom Layer:
  region net +5: 55.245,79.604
  region net +5: 51.841,77.775
  pour cut-out: 45.136,42.799 45.263,42.799 52.502,42.799 52.502,25.4 44.882,25.4 44.882,42.799
  pour cut-out: 58.039,42.799 58.166,42.799 65.405,42.799 65.405,25.4 57.785,25.4 57.785,42.799
  pour cut-out: 70.866,42.799 70.993,42.799 78.232,42.799 78.232,25.4 70.612,25.4 70.612,42.799
  pour cut-out: 83.693,42.799 83.82,42.799 91.059,42.799 91.059,25.4 83.439,25.4 83.439,42.799
  pour cut-out: 97.028,42.799 97.155,42.799 104.394,42.799 104.394,25.4 96.774,25.4 96.774,42.799
  pour cut-out: 109.22,42.799 109.347,42.799 116.586,42.799 116.586,25.4 108.966,25.4 108.966,42.799
  region net RELAY_6: 71.374,51.943

## Silkscreen, mask and mechanical layers (free items; w line width, h text height)
Top Overlay:
  drawing of 57 lines, arcs and shapes, not listed
  text "Reset" at 43.078,74.778 h1.02
  text "Button 3" at 135.001,73.533 h1.02 r90
  text "Button 2" at 135.001,61.976 h1.02 r90
  text "Button 1" at 135.001,50.8 h1.02 r90
  text "LED 8" at 131.318,46.609 h0.76
  text "LED 7" at 131.318,44.831 h0.76
  text "LED 6" at 131.318,43.053 h0.76
  text "SPI" at 28.702,42.545 h0.76
  text "UART" at 33.147,42.545 h0.76
  text "I2C" at 36.449,42.545 h0.76
  text "GND" at 26.924,41.656 h0.76 r270
  text "GND" at 31.75,41.656 h0.76 r270
  text "GND" at 38.989,41.656 h0.76 r270
  text "LED 5" at 131.318,41.275 h0.76
  text "LED 4" at 131.318,39.497 h0.76
  text "SDA" at 38.989,39.116 h0.76 r270
  text "TX" at 31.75,38.862 h0.76 r270
  text "MO" at 26.924,38.735 h0.76 r270
  text "LED 3" at 131.318,37.719 h0.76
  text "SCL" at 38.989,36.449 h0.76 r270
  text "MI" at 26.924,36.068 h0.76 r270
  text "RX" at 31.75,36.068 h0.76 r270
  text "LED 2" at 131.318,35.941 h0.76
  text "LED 1" at 131.318,34.163 h0.76
  text "SCK" at 26.924,34.036 h0.76 r270
  text "Relay 1" at 44.196,26.314 h1.02 r90
  text "Relay 3" at 69.952,26.264 h1.02 r90
  text "Relay 4" at 82.956,26.264 h1.02 r90
  text "Relay 6" at 108.306,26.162 h1.02 r90
  text "Relay 5" at 96.037,26.137 h1.02 r90
  text "Relay 2" at 57.201,26.111 h1.02 r90
Bottom Overlay:
  text "EdgeDevice Extension / Version 1.0 / Marco Stauber" at 134.772,68.072 h1.52

## Dimensions
25.4,25.4 to 135.763,25.4 on Mechanical 16
135.763,25.4 to 135.763,82.804 on Mechanical 16

## Text inside footprints (layer, text, board x,y; h text height)
J1: Top Overlay "9" at 33.05,65.917 h1.02 r270